# EAGLE board 8steps (EAGLE 7.4.0)
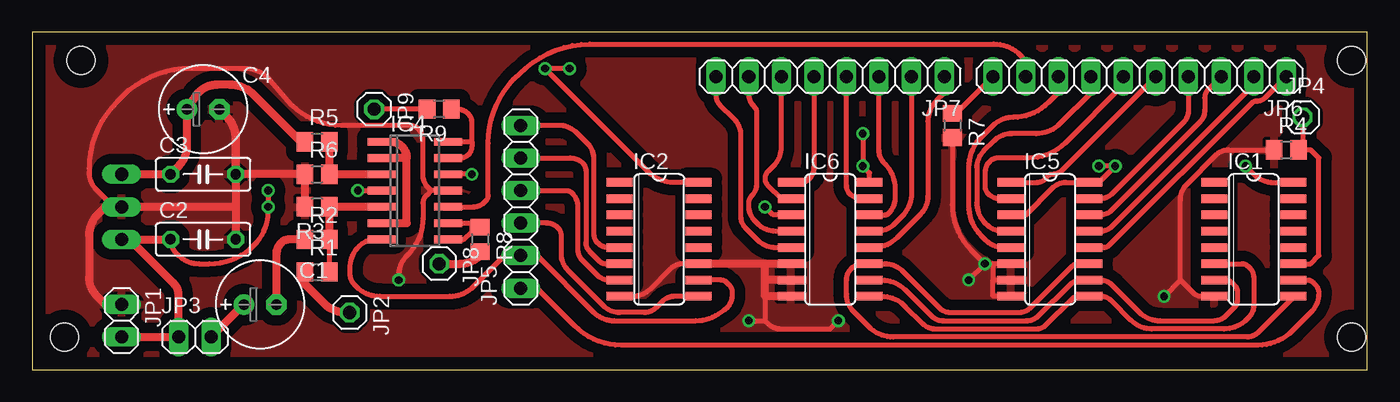
[diagram p0: board, top side]
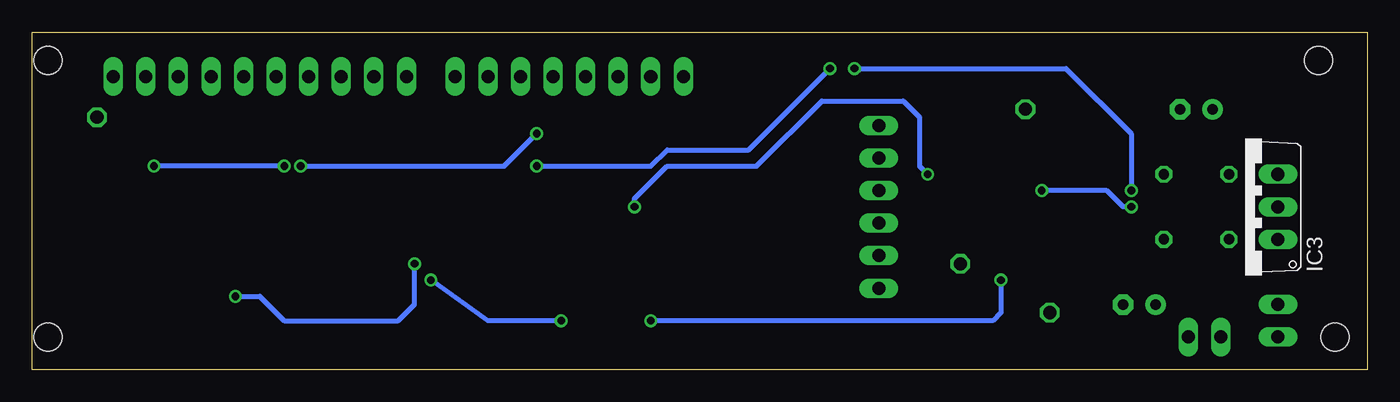
[diagram p1: board, bottom side, seen from below]

Size 104.12 x 26.34 mm. Coordinates in mm from the lower left corner, seen from the top.
Outline: 0,0 104.12,0 104.12,26.34 0,26.34 0,0
Copper layers (1*16): Top 0.035mm / dielectric 1.5mm / Bottom 0.035mm
Design rules "default": minimum track width 10mil, minimum drill 24mil, track to track 8mil, track to pad 8mil, pad to pad 8mil, via to via 8mil, smd to smd 8mil, copper to edge 40mil, drill to drill 8mil, minimum pad ring 10mil, minimum via ring 8mil, stop-mask expansion 4mil, vias tented up to drill 0mil, thermal gap 10mil
Net classes: 0 default: clearance 0.205 mm
Holes 2.2 mm at 2.54,2.54 3.81,24.13 102.87,2.54 102.87,24.13

## Footprints (pad centres in the part's own frame; a part is rotated, then mirrored left to right if it is on the bottom)
E2,5-7 = drill 0.813 pad 1.6: + -1.27,0 | drill 0.813 pad 1.6 octagon: - 1.27,0
C050-025X075 = drill 0.813 octagon: 1 -2.54,0; 2 2.54,0
SO16 = smd 0.66 x 2.032: 1 -4.445,-3.073; 2 -3.175,-3.073; 3 -1.905,-3.073; 4 -0.635,-3.073; 5 0.635,-3.073; 6 1.905,-3.073; 7 3.175,-3.073; 8 4.445,-3.073; 9 4.445,3.073; 10 3.175,3.073; 11 1.905,3.073; 12 0.635,3.073; 13 -0.635,3.073; 14 -1.905,3.073; 15 -3.175,3.073; 16 -4.445,3.073
TO220V = drill 1.016 long: 1 -2.54,-2.54; 2 0,-2.54; 3 2.54,-2.54
SO14 = smd 0.6 x 2.2: 1 -3.81,-2.6; 2 -2.54,-2.6; 3 -1.27,-2.6; 4 0,-2.6; 5 1.27,-2.6; 6 2.54,-2.6; 7 3.81,-2.6; 8 3.81,2.6; 9 2.54,2.6; 10 1.27,2.6; 11 0,2.6; 12 -1.27,2.6; 13 -2.54,2.6; 14 -3.81,2.6
1X02 = drill 1.016 long: 1 -1.27,0; 2 1.27,0
1X01 = drill 1.016 octagon: 1 0,0
1X06 = drill 1.016 long: 1 -6.35,0; 2 -3.81,0; 3 -1.27,0; 4 1.27,0; 5 3.81,0; 6 6.35,0
1X10 = drill 1.016 long: 1 -11.43,0; 2 -8.89,0; 3 -6.35,0; 4 -3.81,0; 5 -1.27,0; 6 1.27,0; 7 3.81,0; 8 6.35,0; 9 8.89,0; 10 11.43,0
1X08 = drill 1.016 long: 1 -8.89,0; 2 -6.35,0; 3 -3.81,0; 4 -1.27,0; 5 1.27,0; 6 3.81,0; 7 6.35,0; 8 8.89,0
R0805 = smd 1.3 x 1.5: 1 -0.95,0; 2 0.95,0

## Placement (x,y rotation side)
C1  100u  [E2,5-7]  17.78,5.08 0 top
C2  100n  [C050-025X075]  13.34,10.16 0 top
C3  100n  [C050-025X075]  13.34,15.24 0 top
C4  47u  [E2,5-7]  13.34,20.32 0 top
IC1  4040D  [SO16]  95.25,10.16 270 top
IC2  4040D  [SO16]  48.9,10.16 270 top
IC3  7805TV  [TO220V]  9.53,12.7 90 bottom
IC4  TL084D  [SO14]  29.84,13.97 270 top
IC5  4051D  [SO16]  79.38,10.16 270 top
IC6  4051D  [SO16]  62.23,10.16 270 top
JP1  PWR  [1X02]  6.99,3.81 270 top
JP2  CK_IN  [1X01]  24.77,4.45 270 top
JP3  TRG  [1X02]  12.7,2.54 0 top
JP4  RST  [1X01]  99.06,19.68 0 top
JP5  CK_SEL  [1X06]  38.1,12.7 90 top
JP6  GATE/LED  [1X10]  86.36,22.86 180 top
JP7  POT  [1X08]  62.23,22.86 180 top
JP8  GATE_OUT  [1X01]  31.75,8.26 270 top
JP9  CV_OUT  [1X01]  26.67,20.32 270 top
R1  100  [R0805]  22.23,7.62 0 top
R2  100  [R0805]  22.23,10.16 0 top
R3  100k  [R0805]  22.23,12.7 180 top
R4  10k  [R0805]  97.79,17.14 0 top
R5  1k  [R0805]  22.23,17.78 0 top
R6  1k  [R0805]  22.23,15.24 0 top
R7  100k  [R0805]  71.75,19.05 270 top
R8  1K  [R0805]  34.92,10.16 270 top
R9  100  [R0805]  31.75,20.32 180 top

## Library data of the parts
C1-C4 R1-R9 = rcl
IC1 IC2 IC5 IC6 = 40xx
IC3 IC4 = linear
JP1-JP9 = pinhead

## Nets
B0: IC1.9 IC5.11 IC6.11
B1: IC1.7 IC5.10 IC6.10
B2: IC1.6 IC5.9 IC6.9
GATE_RAW: IC4.10 JP6.9
GND: C2.2 C3.2 C4.- IC1.8 IC2.8 IC2.11 IC3.2 IC4.11 IC5.6 IC5.7 IC5.8 IC6.6 IC6.7 IC6.8 JP1.1 R3.2 R4.1 R6.1 R7.2
N$1: IC4.3 R5.2 R6.2
N$2: C1.- R2.1
N$3: IC4.12 IC6.3
N$4: IC2.10 IC4.7 JP5.2
N$5: IC2.9 JP5.3
N$6: IC2.7 JP5.4
N$7: IC2.6 JP5.5
N$8: IC2.5 JP5.6
N$9: IC1.10 JP5.1
N$10: IC5.12 JP6.1
N$11: IC5.13 JP6.2
N$12: IC5.14 JP6.3
N$13: IC5.15 JP6.4
N$14: IC5.1 JP6.5
N$15: IC5.4 JP6.7
N$16: IC5.2 JP6.6
N$17: IC5.5 JP6.8
N$18: IC6.12 JP7.1
N$19: IC6.13 JP7.2
N$20: IC6.14 JP7.3
N$21: IC6.15 JP7.4
N$22: IC6.1 JP7.5
N$23: IC6.4 JP7.7
N$25: IC6.5 JP7.8
N$26: IC4.13 IC4.14 R9.1
N$27: JP9.1 R9.2
N$28: JP6.10 R7.1
N$29: IC1.11 JP4.1 R4.2
N$30: IC4.8 IC4.9 R8.1
N$31: JP8.1 R8.2
N$32: IC6.2 JP7.6
N$33: IC4.5 R1.2 R2.2 R3.1
N$34: C1.+ JP3.2
N$35: JP2.1 R1.1
V5V: C3.1 C4.+ IC3.3 R5.1
V_REF: IC4.1 IC4.2 IC4.6
VCC: C2.1 IC1.16 IC2.16 IC3.1 IC4.4 IC5.3 IC5.16 IC6.16 JP1.2 JP3.1

## Tracks (layer width: path | path; a pad name or v marks a point on that pad's centre or on a via)
B0
  Top 0.406: IC5.11 81.54,8.26 arc45 81.09,8.07 77.89,4.86 arc-45 76.88,4.45 71.65,4.45 arc-45 70.75,4.82 67.9,7.67 arc45 66.48,8.26 IC6.11 64.77,8.26 arc90 63.5,6.99 63.5,5.87 arc45 64.06,4.52 65.25,3.33 arc45 67.16,2.54 94.72,2.54 arc45 95.62,2.91 98.32,5.61 IC1.9
B1
  Top 0.406: IC6.10 66.26,6.99 arc-45 68.05,6.24 70.07,4.23 arc45 71.07,3.81 77.52,3.81 arc45 78.52,4.23 80.91,6.61 arc-45 81.81,6.99 IC5.10 83.29,6.99 arc-45 84.19,6.61 86.32,4.48 arc45 87.94,3.81 92.18,3.81 arc45 93.08,4.18 93.72,4.82 arc45 93.98,5.45 93.98,6.09 arc45 93.79,6.54 93.53,6.8 arc45 93.08,6.99 IC1.7
B2
  Top 0.406: IC6.9 66.23,5.71 arc-45 68.08,4.95 69.43,3.59 arc45 70.44,3.17 78.37,3.17 arc45 79,3.44 81.09,5.53 arc-45 81.54,5.71 IC5.9 83.29,5.71 arc-45 84.19,5.34 85.69,3.85 arc45 87.31,3.17 92.93,3.17 arc45 94.72,3.92 94.83,4.03 arc45 95.25,5.03 95.25,7.25 arc45 94.99,7.88 94.8,8.07 arc45 94.35,8.26 IC1.6
GATE_RAW
  Top 0.406: IC4.10 34.4,12.7 arc45 35.3,13.07 35.37,13.15 arc45 35.56,13.6 35.56,17.67 arc-49 38.03,23.12 38.48,23.52 arc-41 43.5,25.4 74.99,25.4 arc-45 77.05,24.55 arc-45 77.47,23.54 JP6.9
GND  (via drill 0.6 pad 0.61)
  Top 0.406: IC5.8 74.93,5.71 74.93,6.99 | 74.93,6.99 IC5.7 | IC5.6 74.93,8.26 | R7.2 71.75,12.85 arc45 73.21,9.34 v74.3,8.26 | IC2.11 50.75,8.26 arc45 49.75,7.84 48.18,6.27 arc-45 46.84,5.71 IC2.8 | 31.11,13.97 30.9,14.19 arc-45 30.48,15.19 30.48,17.89 arc45 30.11,18.79 arc45 29.47,19.05 24.1,19.05 arc-49 19.95,20.96 18.56,22.58 arc49 16.58,23.5 12.36,23.5 arc49 6.61,20.88 6.24,20.46 arc41 4.45,15.7 4.45,15.39 arc45 5,14.05 6.35,12.7 IC3.2 | 89.53,6.99 89.53,13.23 arc-45 90.06,14.5 92.29,16.73 arc-45 93.3,17.14 R4.1 96.89,17.14 | IC1.8 91.18,5.71 arc-45 90.54,5.98 89.53,6.99 | 57.15,5.71 57.15,3.81 | 57.15,3.81 57.37,3.59 arc45 58.37,3.17 62.23,3.17 v62.87,3.81 | v73.03,6.99 v74.3,8.26 | v74.3,8.26 74.93,8.26 | 74.93,8.26 74.93,6.99 | IC4.11 31.11,13.97 | 31.11,13.97 30.74,13.6 arc45 30.48,12.96 30.48,11.82 arc-45 29.3,8.98 29.25,8.93 arc45 28.57,7.31 v28.57,6.99 | v55.88,3.81 57.15,3.81 | 89.53,6.99 v88.27,5.71
  Top 0.61: JP1.1 5.71,5.08 5.03,5.76 arc-45 4.45,7.18 4.45,10.48 arc-45 5.12,12.1 5.71,12.7 6.35,12.7 15.88,12.7 | C3.2 15.88,17.93 arc45 15.09,19.84 C4.- 15.2,19.72 arc-45 15.88,18.1 C3.2 | C3.2 R6.1 R3.2 | IC6.6 57.15,8.26 | 57.15,8.26 IC2.11 | IC6.7 57.15,6.99 | 57.15,6.99 57.15,8.26 | IC6.8 57.15,5.71 57.15,6.99 | 15.88,12.7 C2.2 | C3.2 15.88,12.7
  Bottom 0.406: v62.87,3.81 68.58,3.81 v73.03,6.99 | v28.57,6.99 28.57,4.45 29.21,3.81 v55.88,3.81 | v88.27,5.71 86.36,5.71 84.45,3.81 75.56,3.81 74.3,5.08 v74.3,8.26
  pour Top (isolate 0.813): 0,26.67 104.14,26.67 104.14,0 0,0
N$1
  Top 0.61: IC4.3 R6.2 R5.2
N$2
  Top 0.61: R2.1 20.06,10.16 arc45 19.42,9.9 arc45 19.05,9 C1.-
N$3  (via drill 0.6 pad 0.61)
  Top 0.406: IC6.3 57.78,12.06 v57.15,12.7 | v34.29,15.24 IC4.12
  Bottom 0.406: v57.15,12.7 57.15,13.34 54.61,15.88 47.62,15.88 42.55,20.95 36.2,20.95 34.92,19.68 34.92,15.88 v34.29,15.24
N$4
  Top 0.406: IC4.7 26.82,10.16 arc45 25.48,9.6 arc45 24.77,7.88 24.77,7.57 arc45 25.18,6.57 25.27,6.48 arc45 27.12,5.71 32.57,5.71 arc45 34.42,6.48 36.83,8.89 JP5.2 39.37,8.89 43.78,4.48 arc45 45.4,3.81 51.74,3.81 arc34 53.51,4.34 53.98,4.66 arc56 54.61,5.84 54.61,5.98 arc45 54.35,6.61 54.16,6.8 arc45 53.71,6.99 IC2.10
N$5
  Top 0.406: IC2.9 50.12,5.71 arc45 49.11,5.3 48.63,4.82 arc-45 47.73,4.45 45.83,4.45 arc-45 44.56,4.97 41.8,7.73 arc-45 41.27,9 41.27,10.42 arc45 41.01,11.06 arc45 40.11,11.43 JP5.3
N$6
  Top 0.406: JP5.4 41.65,13.97 arc-45 42.1,13.78 arc-45 42.55,12.7 42.55,9.42 arc45 42.92,8.52 44.03,7.4 arc45 45.04,6.99 IC2.7
N$7
  Top 0.406: JP5.5 41.96,16.51 arc-45 42.96,16.09 arc-45 43.18,15.56 43.18,9.9 arc45 43.44,9.26 44.26,8.44 arc45 44.71,8.26 IC2.6
N$8
  Top 0.406: IC2.5 44.98,9.53 arc-45 44.08,9.9 arc-45 43.81,10.53 43.81,16.4 arc45 43.29,17.67 42.5,18.46 arc45 41.08,19.05 JP5.6
N$9
  Top 0.406: IC1.10 99.43,6.99 arc-45 99.88,6.8 100.07,6.61 arc-45 100.33,5.98 arc-45 99.69,4.45 98.27,3.02 arc-45 95.58,1.91 45.94,1.91 arc-45 42.32,3.4 39.37,6.35 JP5.1
N$10
  Top 0.406: JP6.1 96.15,21.22 arc-45 95.51,20.95 arc45 95.06,20.77 84.01,9.71 arc-45 83.56,9.53 IC5.12
N$11
  Top 0.406: IC5.13 83.29,10.79 arc45 84.19,11.17 95.25,22.23 JP6.2
N$12
  Top 0.406: IC5.14 83.29,12.06 arc45 84.19,12.44 91.02,19.27 arc45 91.44,20.27 91.44,21.22 arc-45 91.7,21.85 JP6.3
N$13
  Top 0.406: JP6.4 90.17,20.27 arc-45 89.75,19.27 84.19,13.71 arc-45 83.29,13.34 IC5.15
N$14
  Top 0.406: IC5.1 78.37,14.61 arc45 79,14.87 79.3,15.16 arc-45 79.48,15.24 arc45 80.38,15.61 JP6.5
N$15
  Top 0.406: JP6.7 82.55,21.59 80.14,19.18 arc-45 78.29,18.41 76.4,18.41 arc45 74.98,17.83 74.19,17.04 arc45 73.66,15.77 73.66,13.03 arc45 74.34,11.38 arc45 75.76,10.79 IC5.4
N$16
  Top 0.406: JP6.6 85.09,22.23 80.55,17.69 arc-45 77.71,16.51 75.3,16.51 arc45 74.67,16.25 arc45 74.3,15.35 74.3,14.34 arc45 74.56,13.71 arc45 75.46,13.34 IC5.2
N$17
  Top 0.406: JP6.8 80.01,21.85 arc-45 79.82,21.4 79.24,20.82 arc-45 76.5,19.68 arc45 74.9,19.02 73.97,18.09 arc45 73.03,15.8 73.03,12.77 arc45 73.97,10.48 74.34,10.11 arc45 75.76,9.53 IC5.5
N$18
  Top 0.406: JP7.1 71.12,21.59 70.52,20.99 arc45 69.85,19.37 69.85,13.53 arc-45 69.26,12.11 67.42,10.27 arc-45 65.62,9.53 IC6.12
N$19
  Top 0.406: JP7.2 68.58,13.78 arc-45 67.81,11.93 67.23,11.35 arc-45 65.89,10.79 IC6.13
N$20
  Top 0.406: IC6.14 66.52,12.06 arc45 66.78,12.17 arc45 67.31,13.44 67.31,14.12 arc45 66.52,16.03 66.46,16.09 arc-45 66.04,17.1 JP7.3
N$21
  Top 0.406: IC6.15 64.66,13.34 arc-45 63.76,13.71 arc-45 63.5,14.34 JP7.4
N$22
  Top 0.406: JP7.5 60.96,15.77 arc-45 60.59,14.87 arc-45 59.95,14.61 IC6.1
N$23
  Top 0.406: IC6.4 57.98,10.79 arc-45 56.56,11.38 56.41,11.54 arc-45 55.88,12.81 55.88,12.96 arc-45 56.14,13.6 arc45 56.52,14.5 56.52,20.01 arc45 56.3,20.54 arc-45 55.88,21.54 JP7.7
N$24
  pour Top (isolate 0.813): 0,26.04 104.14,26.04 104.14,0 0,0
N$25
  Top 0.406: JP7.8 53.34,21.33 arc45 53.6,20.69 54.72,19.58 arc-45 55.24,18.31 55.24,12.02 arc45 55.66,11.01 56.56,10.11 arc45 57.98,9.53 IC6.5
N$26
  Top 0.406: 34.29,17.78 34.29,17.41 arc-90 33.39,16.51 IC4.13 | IC4.14 34.29,17.78 | 34.29,17.78 34.29,19.31 arc45 34.03,19.95 arc45 33.13,20.32 R9.1
N$27
  Top 0.406: R9.2 JP9.1
N$28
  Top 0.406: JP6.10 71.75,19.68 R7.1
N$29
  Top 0.406: IC1.11 99.69,8.26 100.33,8.89 100.33,16.51 99.69,17.14 R4.2 99.06,17.46 JP4.1
N$30
  Top 0.406: IC4.9 34.29,11.43 | 34.29,11.43 34.6,11.43 R8.1 | IC4.8 33.66,10.16 34.29,10.79 34.29,11.43
N$31
  Top 0.61: JP8.1 33.39,8.26 arc45 34.92,8.89 R8.2
N$32
  Top 0.406: JP7.6 58.42,17.34 arc-45 57.83,15.92 57.41,15.5 arc45 57.15,14.87 arc45 57.34,14.42 58.42,13.34 IC6.2
N$33
  Top 0.406: R2.2 R1.2
  Top 0.61: R2.2 R3.1 IC4.5
N$34
  Top 0.61: C1.+ JP3.2
N$35
  Top 0.61: JP2.1 24.44,4.45 arc-45 22.82,5.12 21.37,6.57 arc-45 20.95,7.57 20.95,7.62 R1.1
V5V
  Top 0.61: R5.1 20.95,17.78 17.28,21.46 arc45 15.43,22.23 14.41,22.23 arc56 12.74,21.33 C4.+ 12.06,17.46 arc-45 11.39,15.84 C3.1 IC3.3
V_REF
  Top 0.61: IC4.6 29.21,11.43 29.21,16.51 | IC4.1 27.94,17.78 arc-90 29.21,16.51 | 29.21,16.51 IC4.2
VCC  (via drill 0.6 pad 0.61)
  Top 0.406: v94.61,15.88 95.36,15.13 arc45 97.26,14.61 IC1.16 | C2.1 arc45 11.24,9.08 11.39,8.93 arc45 13.01,8.26 13.82,8.26 arc45 17.33,9.71 arc45 18.41,12.33 v18.41,12.7 v18.41,13.97 | v25.4,13.97 IC4.4 | IC2.16 50.01,14.61 arc-45 48.11,15.39 v40.01,23.5 v41.91,23.5 | IC6.16 65.3,15.34 v64.77,15.88 v64.77,18.41 | IC5.3 77.47,12.06 79.59,14.19 arc-45 80.6,14.61 IC5.16 83.19,14.61 v84.45,15.88 v83.19,15.88
  Top 0.61: JP1.2 JP3.1 11.43,5.76 arc45 11.01,6.77 7.62,10.16 | IC3.1 7.62,10.16 | 7.62,10.16 C2.1
  Bottom 0.406: v84.45,15.88 v94.61,15.88 | v18.41,12.7 19.05,12.7 20.32,13.97 v25.4,13.97 | v40.01,23.5 23.5,23.5 18.41,18.41 v18.41,13.97 | v64.77,15.88 55.88,15.88 54.61,17.14 48.26,17.14 v41.91,23.5 | v83.19,15.88 67.31,15.88 v64.77,18.41

## Text on the board
Document: 8 STEPS SEQUENCER | gAZ '22